# Altium PCB PCB_REV1.PcbDoc (part 1 of 2)
Units mm, origin at the board's own origin, x right, y up, seen from the top; angles counter-clockwise.
Board outline 243.25 x 252.25 mm, 2 copper layers (Top Layer, Bottom Layer); 216 components, 186 nets, 603 pads, 64 vias.
Unrouted connection lines stored in the file: 121.
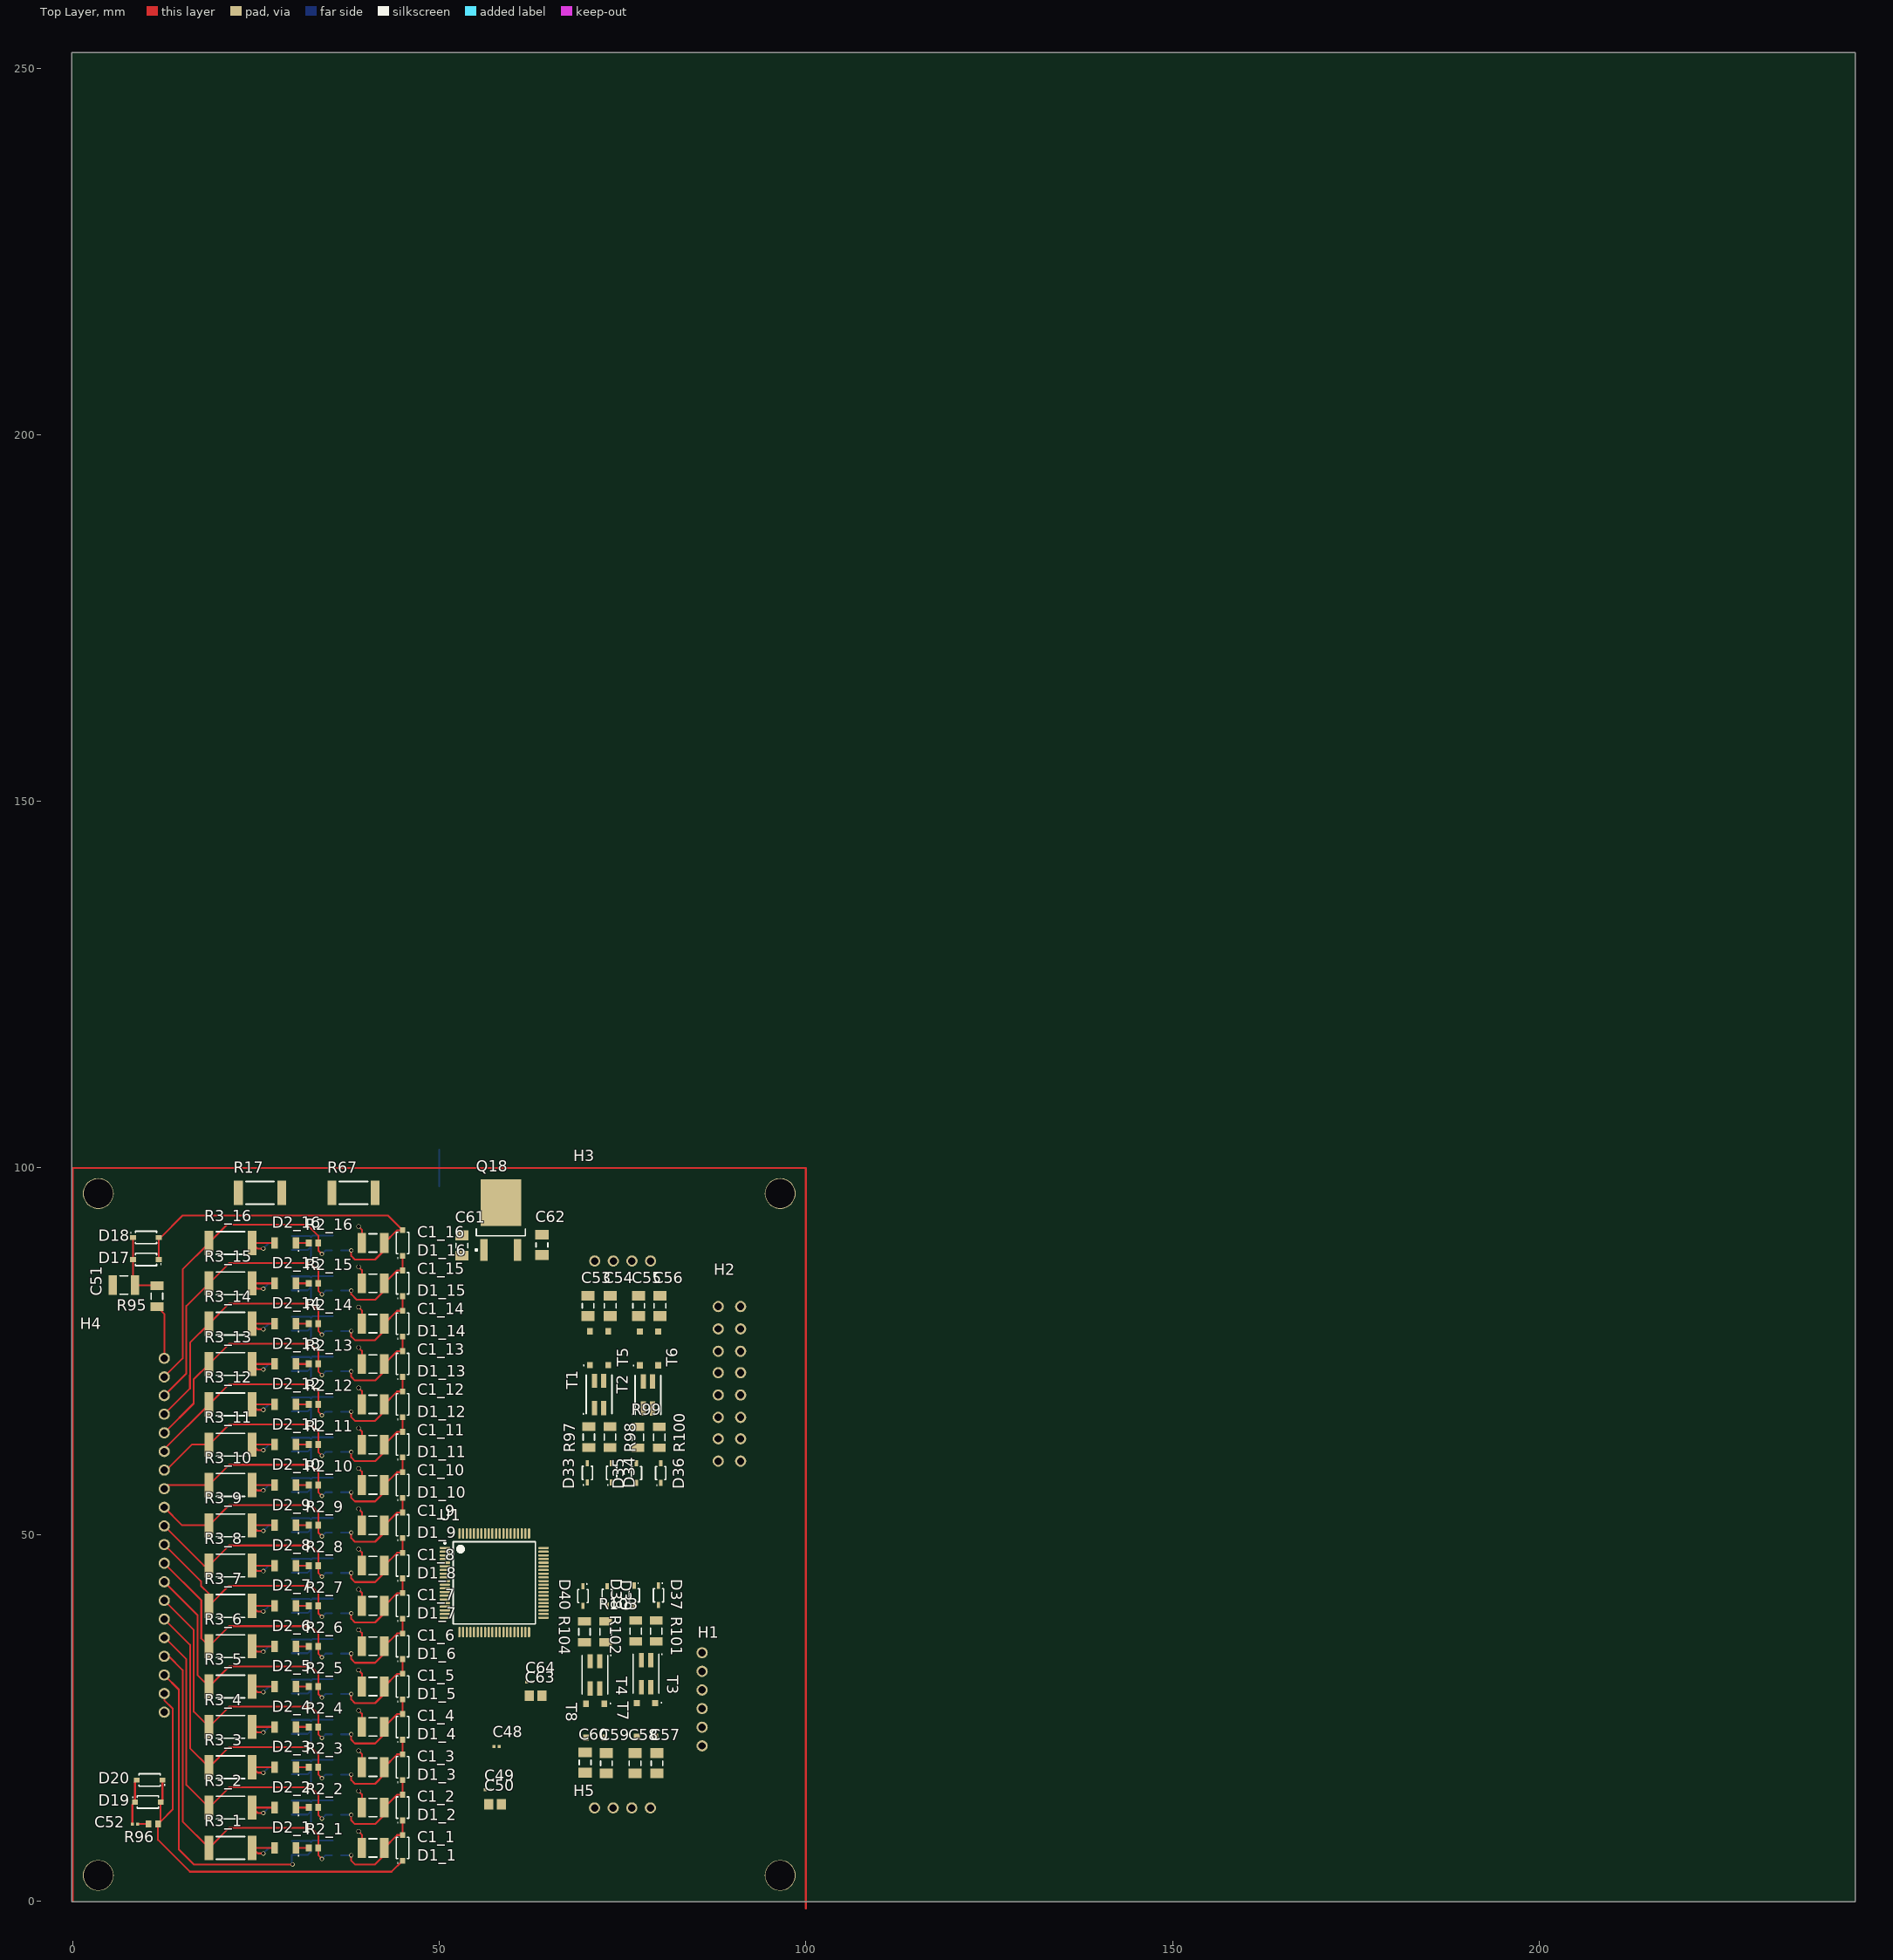
[diagram p0: Top Layer view]
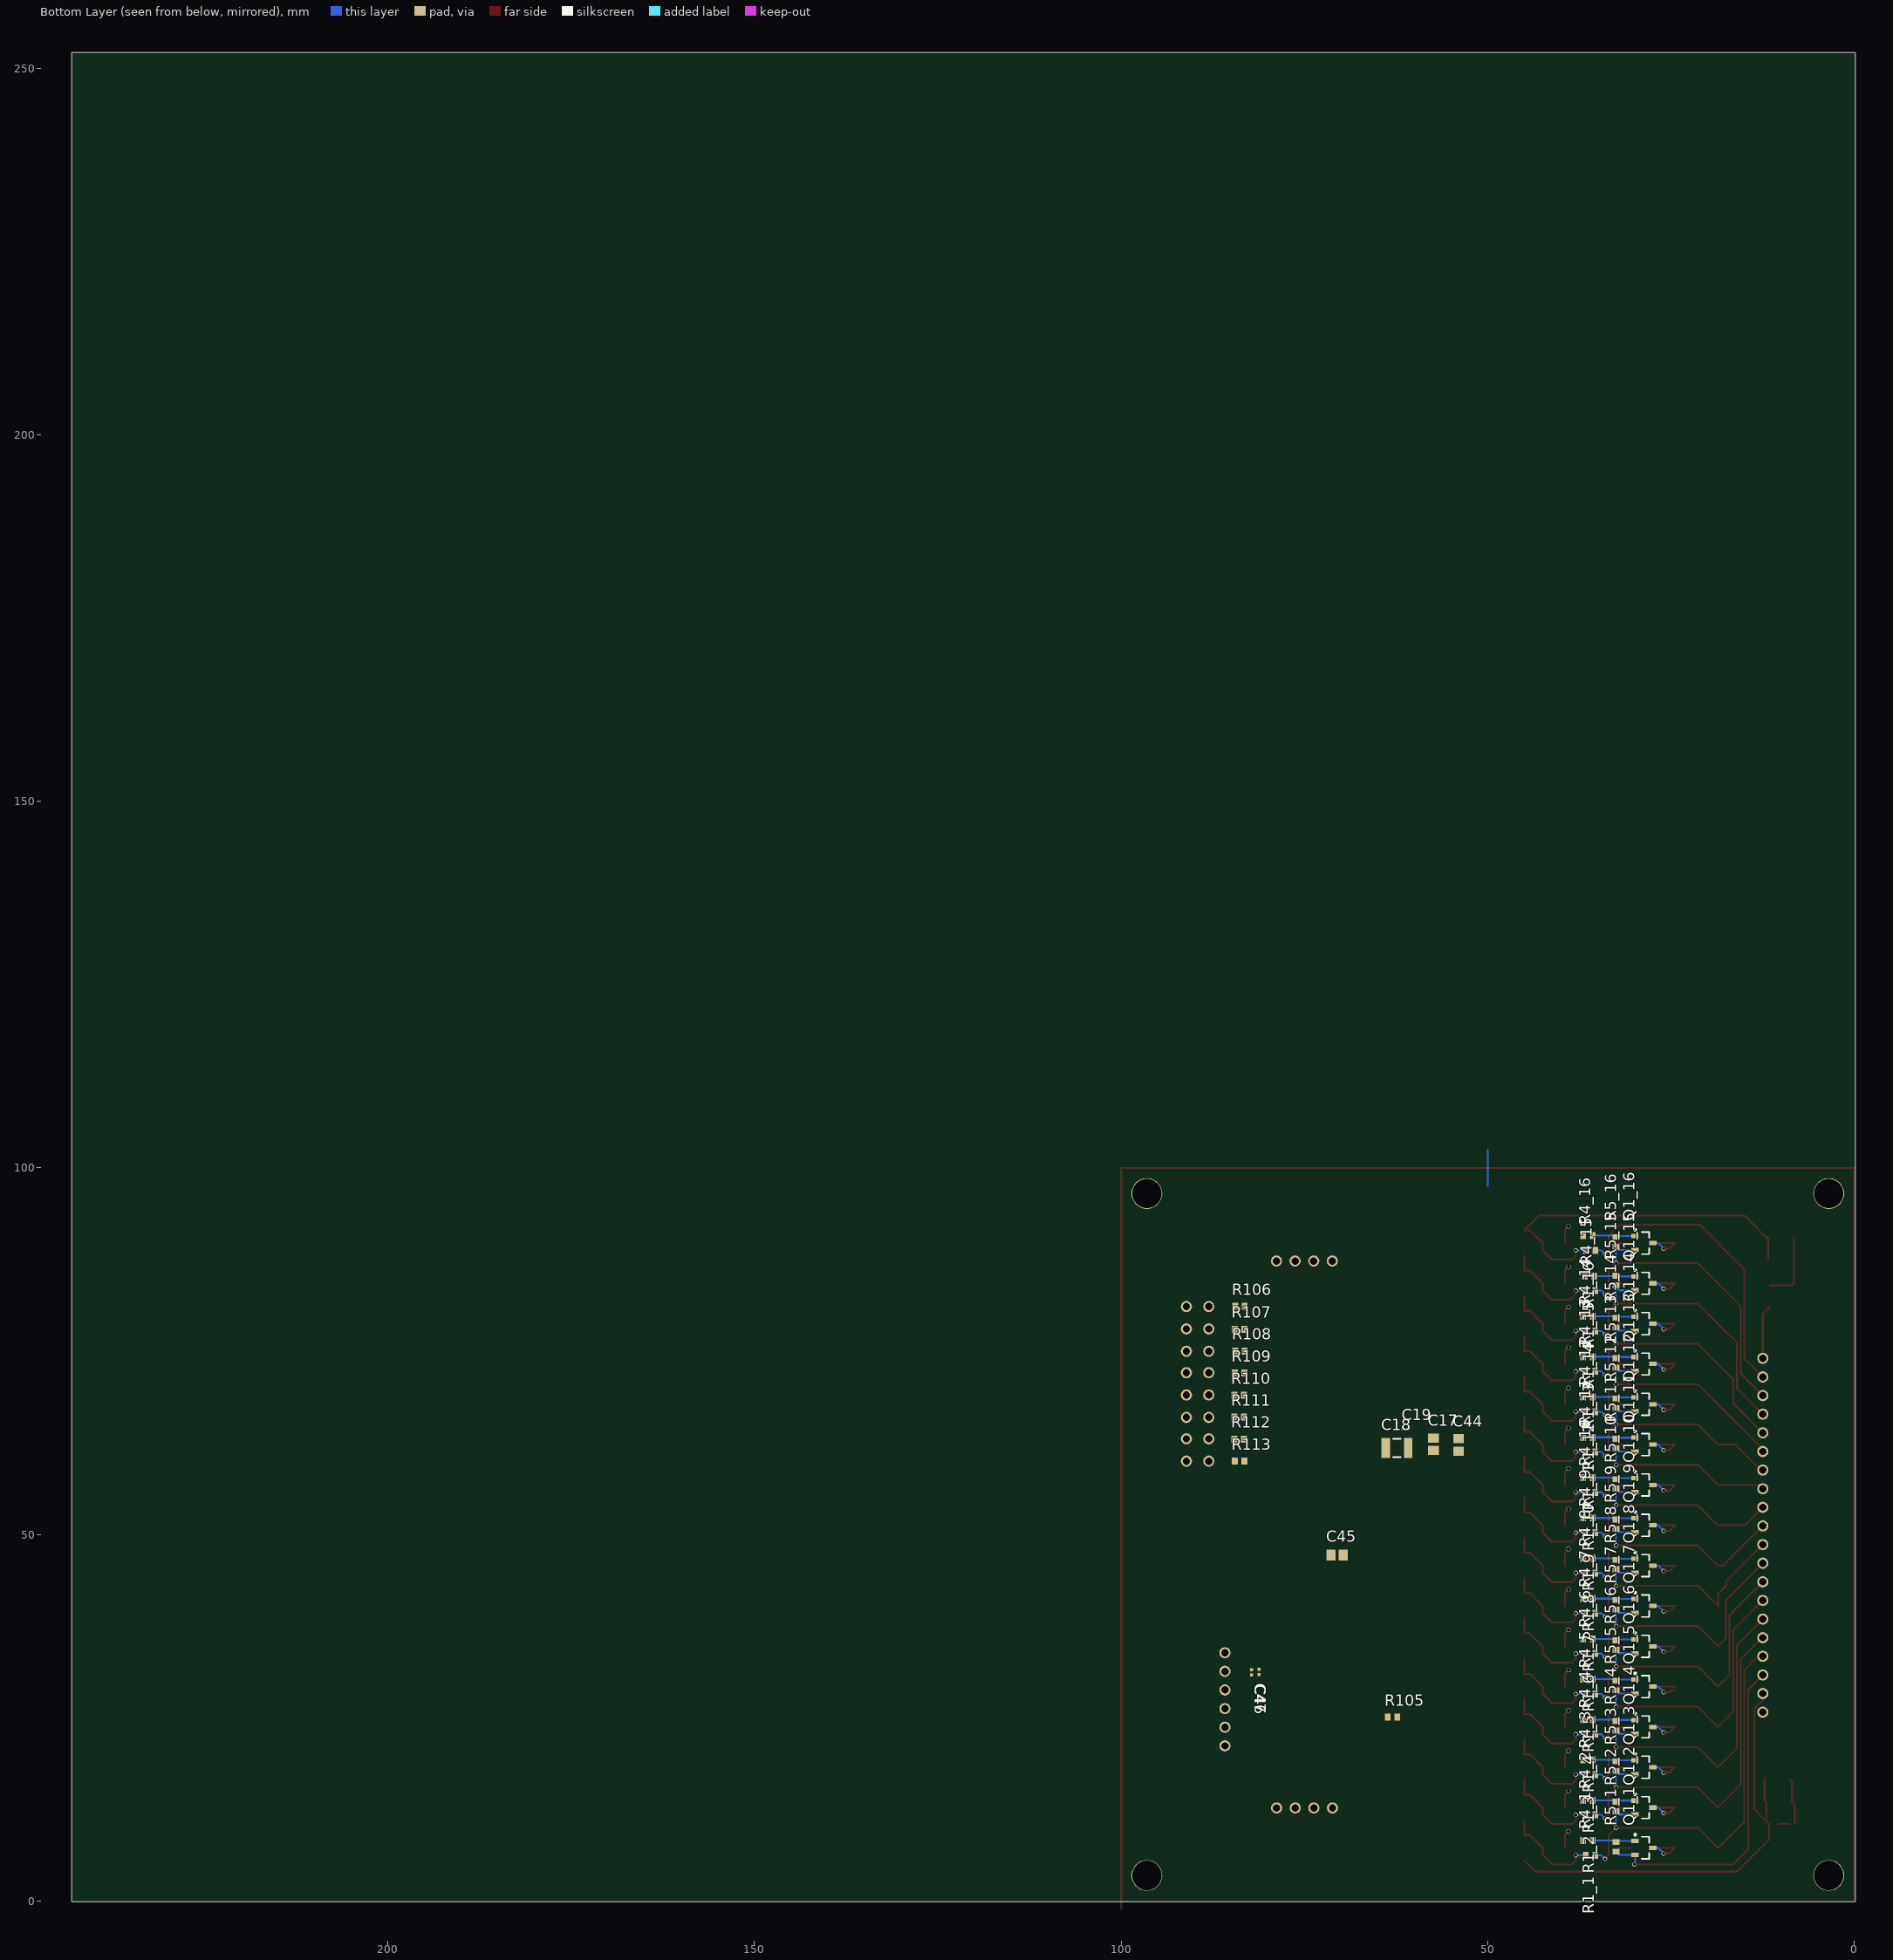
[diagram p1: Bottom Layer view, seen from below]

## Layer stack, top to bottom
Top Solder: solder mask 0.0102, Solder Resist, Dk 3.5
Top Layer: signal copper 0.0356
Dielectric 1: dielectric 0.32, FR-4, Dk 4.8
Bottom Layer: signal copper 0.0356
Bottom Solder: solder mask 0.0102, Solder Resist, Dk 3.5

## Board outline
0,-0.127 cw(c0,0) -0.127,0 -0.127,252 cw(c0,252) 0,252.127 243,252.127 cw(c243,252) 243.127,252 cw(c243,252) 243.127,251.999 243.127,0 cw(c243,0) 243,-0.127

## Design rules (kind name [scope] priority, off if disabled: settings)
Clearance [All] p1: gap=0.254 ignorepadtopadclearanceinfootprint=FALSE except(0: Arc-Hole Track-Hole SMDPad-Hole THPad-Hole Via-Hole Fill-Hole Poly-Hole Region-Hole Text-Hole)
PolygonConnect [All] p1: connectstyle=Relief reliefconductorwidth=0.254 reliefentries=4 polygonreliefangle="90 Angle" airgapwidth=0.254
RoutingVias [All] p1: holewidth=0.711 width=1.27 viastyle="Through Hole" minholewidth=0.711 minwidth=1.27 maxholewidth=0.711 maxwidth=1.27
SolderMaskExpansion [All] p1: expansion=0.102
Width [All] p1: maxlimit=0.254 minlimit=0.254 preferedwidth=0.254
30 further rules are at their usual default settings.

## Classes and differential pairs
component class 2: C51 C52 D17 D18 D19 D20 H4 R95 R96
component class 1: C1_1 C65 D1_1 D2_1 D41 D42 Q1_1 Q19 R1_1 R2_1 R3_1 R4_1 R5_1 R114 R115 R116 R117 R118
component class 2: C1_2 D1_2 D2_2 Q1_2 R1_2 R2_2 R3_2 R4_2 R5_2
component class 3: C1_3 D1_3 D2_3 Q1_3 R1_3 R2_3 R3_3 R4_3 R5_3
component class 4: C1_4 D1_4 D2_4 Q1_4 R1_4 R2_4 R3_4 R4_4 R5_4
component class 5: C1_5 D1_5 D2_5 Q1_5 R1_5 R2_5 R3_5 R4_5 R5_5
component class 6: C1_6 D1_6 D2_6 Q1_6 R1_6 R2_6 R3_6 R4_6 R5_6
component class 7: C1_7 D1_7 D2_7 Q1_7 R1_7 R2_7 R3_7 R4_7 R5_7
component class 8: C1_8 D1_8 D2_8 Q1_8 R1_8 R2_8 R3_8 R4_8 R5_8
component class 9: C1_9 D1_9 D2_9 Q1_9 R1_9 R2_9 R3_9 R4_9 R5_9
component class 10: C1_10 D1_10 D2_10 Q1_10 R1_10 R2_10 R3_10 R4_10 R5_10
component class 11: C1_11 D1_11 D2_11 Q1_11 R1_11 R2_11 R3_11 R4_11 R5_11
component class 12: C1_12 D1_12 D2_12 Q1_12 R1_12 R2_12 R3_12 R4_12 R5_12
component class 13: C1_13 D1_13 D2_13 Q1_13 R1_13 R2_13 R3_13 R4_13 R5_13
component class 14: C1_14 D1_14 D2_14 Q1_14 R1_14 R2_14 R3_14 R4_14 R5_14
component class 15: C1_15 D1_15 D2_15 Q1_15 R1_15 R2_15 R3_15 R4_15 R5_15
component class 16: C1_16 D1_16 D2_16 Q1_16 R1_16 R2_16 R3_16 R4_16 R5_16
channel class VSENSE_EQ: 1 2 3 4 5 6 7 8 9 10 11 12 13 14 15 16

## Components (designator, comment, footprint, x,y, rotation, side; value= is the part's Value field where it differs from the comment)
C1_1 "Cap" "1210 cap" 40.975,7.25 r0 top value=1uF (schematic designator C1)
C1_2 "Cap" "1210 cap" 40.975,12.75 r0 top value=1uF (schematic designator C1)
C1_3 "Cap" "1210 cap" 40.975,18.25 r0 top value=1uF (schematic designator C1)
C1_4 "Cap" "1210 cap" 40.975,23.75 r0 top value=1uF (schematic designator C1)
C1_5 "Cap" "1210 cap" 40.975,29.25 r0 top value=1uF (schematic designator C1)
C1_6 "Cap" "1210 cap" 40.975,34.75 r0 top value=1uF (schematic designator C1)
C1_7 "Cap" "1210 cap" 40.975,40.25 r0 top value=1uF (schematic designator C1)
C1_8 "Cap" "1210 cap" 40.975,45.75 r0 top value=1uF (schematic designator C1)
C1_9 "Cap" "1210 cap" 40.975,51.25 r0 top value=1uF (schematic designator C1)
C1_10 "Cap" "1210 cap" 40.975,56.75 r0 top value=1uF (schematic designator C1)
C1_11 "Cap" "1210 cap" 40.975,62.25 r0 top value=1uF (schematic designator C1)
C1_12 "Cap" "1210 cap" 40.975,67.75 r0 top value=1uF (schematic designator C1)
C1_13 "Cap" "1210 cap" 40.975,73.25 r0 top value=1uF (schematic designator C1)
C1_14 "Cap" "1210 cap" 40.975,78.75 r0 top value=1uF (schematic designator C1)
C1_15 "Cap" "1210 cap" 40.975,84.25 r0 top value=1uF (schematic designator C1)
C1_16 "Cap" "1210 cap" 40.975,89.75 r0 top value=1uF (schematic designator C1)
C17 "Cap Semi" "0805 CAP" 57.4,62.3 r270 bottom value=390pF
C18 "Cap Semi" "1210 cap" 62.4,61.8 r180 bottom value=1.8uF
C19 "Cap Semi" "0603 CAP" 61.2,64.4 r180 bottom value=0.1uF
C44 "Cap Semi" "0805 CAP" 54,62.2 r270 bottom value=390pF
C45 "Cap Semi" "0805 CAP" 70.55,47.2 r0 bottom value="4.7 u"
C46 "Cap Semi" "0603 CAP" 82.2,31.2 r90 bottom value=0.1uF
C47 "Cap Semi" "0603 CAP" 81.2,31.25 r90 bottom value=1uF
C48 "Cap Semi" "0603 CAP" 57.8,21.1 r0 top value=0.022uF
C49 "Cap Semi" "0603 CAP" 56.65,15.2 r0 top value=0.1uF
C50 "Cap Semi" "0805 CAP" 57.6,13.2 r0 top value=4.7uF
C51 "Cap Semi" "1210 cap" 7,84 r0 top value=0.1uF
C52 "Cap Semi" "0603 CAP" 8.5,10.5 r0 top value=100pF
C53 "Cap Semi" "1206 CAP" 70.3,81.175 r90 top value=1000pF
C54 "Cap Semi" "1206 CAP" 73.3,81.175 r90 top value=1000pF
C55 "Cap Semi" "1206 CAP" 77.2,81.175 r90 top value=1000pF
C56 "Cap Semi" "1206 CAP" 80.1,81.175 r90 top value=1000pF
C57 "Cap Semi" "1206 CAP" 79.7,18.8 r270 top value=1000pF
C58 "Cap Semi" "1206 CAP" 76.7,18.8 r270 top value=1000pF
C59 "Cap Semi" "1206 CAP" 72.8,18.8 r270 top value=1000pF
C60 "Cap Semi" "1206 CAP" 69.9,18.9 r270 top value=1000pF
C61 "Cap Semi" "1206 CAP" 53.1,89.4 r270 top value=1uF
C62 "Cap Semi" "1206 CAP" 64,89.5 r270 top value=4.7uF
C63 "Cap Semi" "0805 CAP" 63.15,28 r180 top value=4.7uF
C64 "Cap Semi" "0603 CAP" 62.3,29.9 r180 top value=0.1uF
D1_1 "D Zener" "ZENER DIODE" 45,7.25 r90 top (schematic designator D1)
D1_2 "D Zener" "ZENER DIODE" 45,12.75 r90 top (schematic designator D1)
D1_3 "D Zener" "ZENER DIODE" 45,18.25 r90 top (schematic designator D1)
D1_4 "D Zener" "ZENER DIODE" 45,23.75 r90 top (schematic designator D1)
D1_5 "D Zener" "ZENER DIODE" 45,29.25 r90 top (schematic designator D1)
D1_6 "D Zener" "ZENER DIODE" 45,34.75 r90 top (schematic designator D1)
D1_7 "D Zener" "ZENER DIODE" 45,40.25 r90 top (schematic designator D1)
D1_8 "D Zener" "ZENER DIODE" 45,45.75 r90 top (schematic designator D1)
D1_9 "D Zener" "ZENER DIODE" 45,51.25 r90 top (schematic designator D1)
D1_10 "D Zener" "ZENER DIODE" 45,56.75 r90 top (schematic designator D1)
D1_11 "D Zener" "ZENER DIODE" 45,62.25 r90 top (schematic designator D1)
D1_12 "D Zener" "ZENER DIODE" 45,67.75 r90 top (schematic designator D1)
D1_13 "D Zener" "ZENER DIODE" 45,73.25 r90 top (schematic designator D1)
D1_14 "D Zener" "ZENER DIODE" 45,78.75 r90 top (schematic designator D1)
D1_15 "D Zener" "ZENER DIODE" 45,84.25 r90 top (schematic designator D1)
D1_16 "D Zener" "ZENER DIODE" 45,89.75 r90 top (schematic designator D1)
D2_1 "LED0" LED 29,7.25 r180 top (schematic designator D2)
D2_2 "LED0" LED 29,12.75 r180 top (schematic designator D2)
D2_3 "LED0" LED 29,18.25 r180 top (schematic designator D2)
D2_4 "LED0" LED 29,23.75 r180 top (schematic designator D2)
D2_5 "LED0" LED 29,29.25 r180 top (schematic designator D2)
D2_6 "LED0" LED 29,34.75 r180 top (schematic designator D2)
D2_7 "LED0" LED 29,40.25 r180 top (schematic designator D2)
D2_8 "LED0" LED 29,45.75 r180 top (schematic designator D2)
D2_9 "LED0" LED 29,51.25 r180 top (schematic designator D2)
D2_10 "LED0" LED 29,56.75 r180 top (schematic designator D2)
D2_11 "LED0" LED 29,62.25 r180 top (schematic designator D2)
D2_12 "LED0" LED 29,67.75 r180 top (schematic designator D2)
D2_13 "LED0" LED 29,73.25 r180 top (schematic designator D2)
D2_14 "LED0" LED 29,78.75 r180 top (schematic designator D2)
D2_15 "LED0" LED 29,84.25 r180 top (schematic designator D2)
D2_16 "LED0" LED 29,89.75 r180 top (schematic designator D2)
D17 "" "DIODE BtoB" 10,87.5 r180 top
D18 "" "DIODE BtoB" 10,90.5 r0 top
D19 "" "DIODE BtoB" 10.25,13.5 r0 top
D20 "" "DIODE BtoB" 10.5,16.5 r180 top
D33 "TVS" "TVS DIODE" 70.2,58.4 r90 top
D34 "TVS" "TVS DIODE" 73.5,58.4 r90 top
D35 "TVS" "TVS DIODE" 76.9,58.375 r90 top
D36 "TVS" "TVS DIODE" 80.2,58.375 r90 top
D37 "TVS" "TVS DIODE" 79.9,41.7 r270 top
D38 "TVS" "TVS DIODE" 76.6,41.7 r270 top
D39 "TVS" "TVS DIODE" 72.9,41.625 r270 top
D40 "TVS" "TVS DIODE" 69.6,41.6 r270 top
H1 "HDR 6" "SERIAL HDR" 100.2,19.9 r90 top
H2 "HDR 16" "THERMO HDR" 99.99,56.444 r90 top
H3 "HDR 4" "COMM HDR" 81.995,100.127 r180 top
H4 "HDR 20" "CELL HDR" -0.835,77.195 r270 top
H5 "HDR 4" "COMM HDR" 68.005,-0.127 r0 top
Q1_1 "2V7002K" N-MOSFET 28.7,7.25 r180 bottom (schematic designator Q1)
Q1_2 "2V7002K" N-MOSFET 28.7,12.75 r180 bottom (schematic designator Q1)
Q1_3 "2V7002K" N-MOSFET 28.7,18.25 r180 bottom (schematic designator Q1)
Q1_4 "2V7002K" N-MOSFET 28.7,23.75 r180 bottom (schematic designator Q1)
Q1_5 "2V7002K" N-MOSFET 28.7,29.25 r180 bottom (schematic designator Q1)
Q1_6 "2V7002K" N-MOSFET 28.7,34.75 r180 bottom (schematic designator Q1)
Q1_7 "2V7002K" N-MOSFET 28.7,40.25 r180 bottom (schematic designator Q1)
Q1_8 "2V7002K" N-MOSFET 28.7,45.75 r180 bottom (schematic designator Q1)
Q1_9 "2V7002K" N-MOSFET 28.7,51.25 r180 bottom (schematic designator Q1)
Q1_10 "2V7002K" N-MOSFET 28.7,56.75 r180 bottom (schematic designator Q1)
Q1_11 "2V7002K" N-MOSFET 28.7,62.25 r180 bottom (schematic designator Q1)
Q1_12 "2V7002K" N-MOSFET 28.7,67.75 r180 bottom (schematic designator Q1)
Q1_13 "2V7002K" N-MOSFET 28.7,73.25 r180 bottom (schematic designator Q1)
Q1_14 "2V7002K" N-MOSFET 28.7,78.75 r180 bottom (schematic designator Q1)
Q1_15 "2V7002K" N-MOSFET 28.7,84.25 r180 bottom (schematic designator Q1)
Q1_16 "2V7002K" N-MOSFET 28.7,89.75 r180 bottom (schematic designator Q1)
Q18 "QNPN" "NPN TRANSISTOR" 58.4,92.9 r90 top
R1_1 "Res1" "0603 RES" 36,6.25 r180 bottom value=1K (schematic designator R1)
R1_2 "Res1" "0603 RES" 36,11.75 r180 bottom value=1K (schematic designator R1)
R1_3 "Res1" "0603 RES" 36,17.25 r180 bottom value=1K (schematic designator R1)
R1_4 "Res1" "0603 RES" 36,22.75 r180 bottom value=1K (schematic designator R1)
R1_5 "Res1" "0603 RES" 36,28.25 r180 bottom value=1K (schematic designator R1)
R1_6 "Res1" "0603 RES" 36,33.75 r180 bottom value=1K (schematic designator R1)
R1_7 "Res1" "0603 RES" 36,39.25 r180 bottom value=1K (schematic designator R1)
R1_8 "Res1" "0603 RES" 36,44.75 r180 bottom value=1K (schematic designator R1)
R1_9 "Res1" "0603 RES" 36,50.25 r180 bottom value=1K (schematic designator R1)
R1_10 "Res1" "0603 RES" 36,55.75 r180 bottom value=1K (schematic designator R1)
R1_11 "Res1" "0603 RES" 36,61.25 r180 bottom value=1K (schematic designator R1)
R1_12 "Res1" "0603 RES" 36,66.75 r180 bottom value=1K (schematic designator R1)
R1_13 "Res1" "0603 RES" 36,72.25 r180 bottom value=1K (schematic designator R1)
R1_14 "Res1" "0603 RES" 36,77.75 r180 bottom value=1K (schematic designator R1)
R1_15 "Res1" "0603 RES" 36,83.25 r180 bottom value=1K (schematic designator R1)
R1_16 "Res1" "0603 RES" 36,88.75 r180 bottom value=1K (schematic designator R1)
R2_1 "Res1" "0603 RES" 32.85,7.25 r0 top value=1K (schematic designator R2)
R2_2 "Res1" "0603 RES" 32.85,12.75 r0 top value=1K (schematic designator R2)
R2_3 "Res1" "0603 RES" 32.85,18.25 r0 top value=1K (schematic designator R2)
R2_4 "Res1" "0603 RES" 32.85,23.75 r0 top value=1K (schematic designator R2)
R2_5 "Res1" "0603 RES" 32.85,29.25 r0 top value=1K (schematic designator R2)
R2_6 "Res1" "0603 RES" 32.85,34.75 r0 top value=1K (schematic designator R2)
R2_7 "Res1" "0603 RES" 32.85,40.25 r0 top value=1K (schematic designator R2)
R2_8 "Res1" "0603 RES" 32.85,45.75 r0 top value=1K (schematic designator R2)
R2_9 "Res1" "0603 RES" 32.85,51.25 r0 top value=1K (schematic designator R2)
R2_10 "Res1" "0603 RES" 32.85,56.75 r0 top value=1K (schematic designator R2)
R2_11 "Res1" "0603 RES" 32.85,62.25 r0 top value=1K (schematic designator R2)
R2_12 "Res1" "0603 RES" 32.85,67.75 r0 top value=1K (schematic designator R2)
R2_13 "Res1" "0603 RES" 32.85,73.25 r0 top value=1K (schematic designator R2)
R2_14 "Res1" "0603 RES" 32.85,78.75 r0 top value=1K (schematic designator R2)
R2_15 "Res1" "0603 RES" 32.85,84.25 r0 top value=1K (schematic designator R2)
R2_16 "Res1" "0603 RES" 32.85,89.75 r0 top value=1K (schematic designator R2)
R3_1 "Res1" "2512 RES" 21.55,7.25 r0 top value=75 (schematic designator R3)
R3_2 "Res1" "2512 RES" 21.55,12.75 r0 top value=75 (schematic designator R3)
R3_3 "Res1" "2512 RES" 21.55,18.25 r0 top value=75 (schematic designator R3)
R3_4 "Res1" "2512 RES" 21.55,23.75 r0 top value=75 (schematic designator R3)
R3_5 "Res1" "2512 RES" 21.55,29.25 r0 top value=75 (schematic designator R3)
R3_6 "Res1" "2512 RES" 21.55,34.75 r0 top value=75 (schematic designator R3)
R3_7 "Res1" "2512 RES" 21.55,40.25 r0 top value=75 (schematic designator R3)
R3_8 "Res1" "2512 RES" 21.55,45.75 r0 top value=75 (schematic designator R3)
R3_9 "Res1" "2512 RES" 21.55,51.25 r0 top value=75 (schematic designator R3)
R3_10 "Res1" "2512 RES" 21.55,56.75 r0 top value=75 (schematic designator R3)
R3_11 "Res1" "2512 RES" 21.55,62.25 r0 top value=75 (schematic designator R3)
R3_12 "Res1" "2512 RES" 21.55,67.75 r0 top value=75 (schematic designator R3)
R3_13 "Res1" "2512 RES" 21.55,73.25 r0 top value=75 (schematic designator R3)
R3_14 "Res1" "2512 RES" 21.55,78.75 r0 top value=75 (schematic designator R3)
R3_15 "Res1" "2512 RES" 21.55,84.25 r0 top value=75 (schematic designator R3)
R3_16 "Res1" "2512 RES" 21.55,89.75 r0 top value=75 (schematic designator R3)
R4_1 "Res1" "0603 RES" 36.35,8.25 r180 bottom value=2K (schematic designator R4)
R4_2 "Res1" "0603 RES" 36.35,13.75 r180 bottom value=2K (schematic designator R4)
R4_3 "Res1" "0603 RES" 36.35,19.25 r180 bottom value=2K (schematic designator R4)
R4_4 "Res1" "0603 RES" 36.35,24.75 r180 bottom value=2K (schematic designator R4)
R4_5 "Res1" "0603 RES" 36.35,30.25 r180 bottom value=2K (schematic designator R4)
R4_6 "Res1" "0603 RES" 36.35,35.75 r180 bottom value=2K (schematic designator R4)
R4_7 "Res1" "0603 RES" 36.35,41.25 r180 bottom value=2K (schematic designator R4)
R4_8 "Res1" "0603 RES" 36.35,46.75 r180 bottom value=2K (schematic designator R4)
R4_9 "Res1" "0603 RES" 36.35,52.25 r180 bottom value=2K (schematic designator R4)
R4_10 "Res1" "0603 RES" 36.35,57.75 r180 bottom value=2K (schematic designator R4)
R4_11 "Res1" "0603 RES" 36.35,63.25 r180 bottom value=2K (schematic designator R4)
R4_12 "Res1" "0603 RES" 36.35,68.75 r180 bottom value=2K (schematic designator R4)
R4_13 "Res1" "0603 RES" 36.35,74.25 r180 bottom value=2K (schematic designator R4)
R4_14 "Res1" "0603 RES" 36.35,79.75 r180 bottom value=2K (schematic designator R4)
R4_15 "Res1" "0603 RES" 36.15,85.25 r180 bottom value=2K (schematic designator R4)
R4_16 "Res1" "0603 RES" 36.35,90.75 r180 bottom value=2K (schematic designator R4)
R5_1 "Res1" "0603 RES" 32.5,7.4 r90 bottom value=100K (schematic designator R5)
R5_2 "Res1" "0603 RES" 32.5,12.9 r90 bottom value=100K (schematic designator R5)
R5_3 "Res1" "0603 RES" 32.5,18.4 r90 bottom value=100K (schematic designator R5)
R5_4 "Res1" "0603 RES" 32.5,23.9 r90 bottom value=100K (schematic designator R5)
R5_5 "Res1" "0603 RES" 32.5,29.4 r90 bottom value=100K (schematic designator R5)
R5_6 "Res1" "0603 RES" 32.5,34.9 r90 bottom value=100K (schematic designator R5)
R5_7 "Res1" "0603 RES" 32.5,40.4 r90 bottom value=100K (schematic designator R5)
R5_8 "Res1" "0603 RES" 32.5,45.9 r90 bottom value=100K (schematic designator R5)
R5_9 "Res1" "0603 RES" 32.5,51.4 r90 bottom value=100K (schematic designator R5)
R5_10 "Res1" "0603 RES" 32.5,56.9 r90 bottom value=100K (schematic designator R5)
R5_11 "Res1" "0603 RES" 32.5,62.4 r90 bottom value=100K (schematic designator R5)
R5_12 "Res1" "0603 RES" 32.5,67.9 r90 bottom value=100K (schematic designator R5)
R5_13 "Res1" "0603 RES" 32.5,73.4 r90 bottom value=100K (schematic designator R5)
R5_14 "Res1" "0603 RES" 32.5,78.9 r90 bottom value=100K (schematic designator R5)
R5_15 "Res1" "0603 RES" 32.5,84.65 r90 bottom value=100K (schematic designator R5)
R5_16 "Res1" "0603 RES" 32.5,89.9 r90 bottom value=100K (schematic designator R5)
R17 "RES3" "2512 RES" 25.55,96.6 r0 top value=200
R67 "RES3" "2512 RES" 38.3,96.6 r0 top value=200
R95 "Res3" "1206 RES" 11.5,82.5 r270 top value=100
R96 "Res3" "0603 RES" 11,10.5 r180 top value=1K
R97 "Res3" "1206 RES" 70.4,63.275 r90 top value=10
R98 "Res3" "1206 RES" 73.3,63.275 r90 top value=10
R99 "Res3" "1206 RES" 77.1,63.25 r90 top value=10
R100 "Res3" "1206 RES" 80,63.25 r90 top value=10
R101 "Res3" "1206 RES" 79.6,36.825 r270 top value=10
R102 "Res3" "1206 RES" 76.8,36.825 r270 top value=10
R103 "Res3" "1206 RES" 72.7,36.725 r270 top value=10
R104 "Res3" "1206 RES" 69.8,36.725 r270 top value=10
R105 "Res3" "0603 RES" 63,25.1 r180 bottom value=1
R106 "Res3" "0603 RES" 83.8,81.1 r0 bottom value=10K
R107 "Res3" "0603 RES" 83.85,78 r0 bottom value=10K
R108 "Res3" "0603 RES" 83.8,75 r0 bottom value=10K
R109 "Res3" "0603 RES" 83.85,72 r0 bottom value=10K
R110 "Res3" "0603 RES" 83.9,69 r0 bottom value=10K
R111 "Res3" "0603 RES" 83.9,66 r0 bottom value=10K
R112 "Res3" "0603 RES" 83.9,63 r0 bottom value=10K
R113 "Res3" "0603 RES" 83.85,60 r0 bottom value=10K
T1 "CHOKE NODE 470u" "CHOKE NODE 470u" 71.8,69.1 r90 top
T2 "CHOKE NODE 470u" "CHOKE NODE 470u" 78.465,69.025 r90 top
T3 "CHOKE NODE 470u" "CHOKE NODE 470u" 78.2,31 r270 top
T4 "CHOKE NODE 470u" "CHOKE NODE 470u" 71.235,30.85 r270 top
T5 "CHOKE NODE 100u" "CHOKE NODE 100u" 71.8,75.4 r90 top
T6 "CHOKE NODE 100u" "CHOKE NODE 100u" 78.6,75.375 r90 top
T7 "CHOKE NODE 100u" "CHOKE NODE 100u" 78.2,24.7 r270 top
T8 "CHOKE NODE 100u" "CHOKE NODE 100u" 71.25,24.6 r270 top
U1 "BQ76PL455A-Q1" BQ76PL455A-Q1 57.5,43.4 r0 top

## Footprints (in the part's own frame and the unit in brackets; to place one, negate y for a bottom-side part, rotate by r counter-clockwise, add the part's x,y. Pads: shape width x height; smd on the part's side, far side on the other; paste and mask are expansions set on the pad)
"0603 CAP" [mm] "C1608X7R1C105K"
  rect 0.42x0.42 smd: 1(-0.35,0) 2(0.35,0)
  body extent -0.31,-0.17 0.32,0.16, height 0.33
"0603 RES" [mm] "Chip Resistor, 2-Leads, Body 1.57x0.85mm, IPC Medium Density"
  rect 0.8x0.95 smd: 1(-0.65,0) 2(0.65,0)
  body extent -0.83,-0.48 0.82,0.48, height 0.5
"0805 CAP" [mm] "Chip Capacitor, 2-Leads, Body 2.00x1.25mm, IPC Medium Density"
  rect 1.25x1.45 smd: 1(-0.85,0) 2(0.85,0)
  body extent -1.07,-0.7 1.08,0.7, height 1.4
"1206 CAP" [mm] "Chip Capacitor, 2-Leads, Body 3.20x1.60mm, IPC Medium Density"
  rect 1.35x1.8 smd: 1(-1.375,0) 2(1.375,0)
  silkscreen extent -0.3,-0.8 0.3,0.8, body extent -1.7,-0.9 1.7,0.9, height 1.8
"1206 RES" [mm] "Chip Resistor, 2-Leads, Body 3.15x1.60mm, IPC Medium Density"
  rect 1.15x1.75 smd: 1(-1.425,0) 2(1.425,0)
  silkscreen extent -0.45,-0.77 0.45,0.77, body extent -1.65,-0.87 1.65,0.87, height 0.6
"1210 cap" [mm] "Chip Capacitor, 2-Leads, Body 3.20x2.50mm, IPC Medium Density"
  rect 1.15x2.7 smd: 1(-1.525,0) 2(1.525,0)
  silkscreen extent -0.55,-1.25 0.55,1.25, body extent -1.75,-1.35 1.75,1.35, height 1.8
"2512 RES" [mm] "Chip Resistor, 2-Leads, Body 6.30x3.15mm, IPC Medium Density"
  rect 1.2x3.3 smd: 1(-2.95,0) 2(2.95,0)
  silkscreen extent -1.95,-1.55 1.95,1.55, body extent -3.16,-1.65 3.16,1.65, height 0.7
BQ76PL455A-Q1 [mm] "MAIN CHIP"
  oval 1.45x0.3 smd: 1(-6.725,4.75) 2(-6.725,4.25) 3(-6.725,3.75) 4(-6.725,3.25) 5(-6.725,2.75) 6(-6.725,2.25) 7(-6.725,1.75) 8(-6.725,1.25) 9(-6.725,0.75) 10(-6.725,0.25) 11(-6.725,-0.25) 12(-6.725,-0.75) 13(-6.725,-1.25) 14(-6.725,-1.75) 15(-6.725,-2.25) 16(-6.725,-2.75) 17(-6.725,-3.25) 18(-6.725,-3.75) 19(-6.725,-4.25) 20(-6.725,-4.75) 41(6.725,-4.75) 42(6.725,-4.25) 43(6.725,-3.75) 44(6.725,-3.25) 45(6.725,-2.75) 46(6.725,-2.25) 47(6.725,-1.75) 48(6.725,-1.25) 49(6.725,-0.75) 50(6.725,-0.25) 51(6.725,0.25) 52(6.725,0.75) 53(6.725,1.25) 54(6.725,1.75) 55(6.725,2.25) 56(6.725,2.75) 57(6.725,3.25) 58(6.725,3.75) 59(6.725,4.25) 60(6.725,4.75)
  oval 0.3x1.45 smd: 21(-4.75,-6.725) 22(-4.25,-6.725) 23(-3.75,-6.725) 24(-3.25,-6.725) 25(-2.75,-6.725) 26(-2.25,-6.725) 27(-1.75,-6.725) 28(-1.25,-6.725) 29(-0.75,-6.725) 30(-0.25,-6.725) 31(0.25,-6.725) 32(0.75,-6.725) 33(1.25,-6.725) 34(1.75,-6.725) 35(2.25,-6.725) 36(2.75,-6.725) 37(3.25,-6.725) 38(3.75,-6.725) 39(4.25,-6.725) 40(4.75,-6.725) 61(4.75,6.725) 62(4.25,6.725) 63(3.75,6.725) 64(3.25,6.725) 65(2.75,6.725) 66(2.25,6.725) 67(1.75,6.725) 68(1.25,6.725) 69(0.75,6.725) 70(0.25,6.725) 71(-0.25,6.725) 72(-0.75,6.725) 73(-1.25,6.725) 74(-1.75,6.725) 75(-2.25,6.725) 76(-2.75,6.725) 77(-3.25,6.725) 78(-3.75,6.725) 79(-4.25,6.725) 80(-4.75,6.725)
  silkscreen extent -6.85,-5.6 5.6,5.6, body extent -6,-6 6,6, height 1.2
"CELL HDR" [mil]
  round 60 hole 39.37: 1(2025,525) 2(1925,525) 3(1825,525) 4(1725,525) 5(1625,525) 6(1525,525) 7(1425,525) 8(1325,525) 9(1225,525) 10(1125,525) 11(1025,525) 12(925,525) 13(825,525) 14(725,525) 15(625,525) 16(525,525) 17(425,525) 18(325,525) 19(225,525) 20(125,525)
  body extent 0,20 2150,555, height 278
"CHOKE NODE 100u" [mm] "445-3959-1-ND"
  rect 0.85x0.8 smd: 1(-2.3,1.25) 2(-2.3,-1.25) 3(2.3,-1.25) 4(2.3,1.25)
  silkscreen extent -2.4,2.05 -2.3,2.15, body extent -2.35,-1.7 2.35,1.7, height 3
"CHOKE NODE 470u" [mm] "732-1686-1-ND"
  rect 1.95x0.7 smd: 1(-1.85,0.635) 2(-1.85,-0.635) 3(1.85,-0.635) 4(1.85,0.635)
  silkscreen extent -2.7,-1.75 2.65,2.2, body extent -2.65,-1.75 2.65,1.75, height 3.6
"COMM HDR" [mil]
  round 60 hole 39.37: 1(125,505) 2(225,505) 3(325,505) 4(425,505)
  body extent 0,0 550,535, height 278
"DIODE BtoB" [mm] "1N4148W-7-F"
  rect 0.8x0.7 smd: 1(-1.75,0) 2(1.75,0)
  silkscreen extent -2.1,-0.85 1.45,0.85, body extent -1.85,-0.85 1.85,0.85, height 1.35
LED [mm] "516-1443-1-ND"
  rect 0.9x1.55 smd: 1(-1.45,0) 2(1.45,0)
  silkscreen extent -1.85,1.03 -1.75,1.12, body extent -1.67,-0.83 1.67,0.83, height 1.14
N-MOSFET [mm] "2V7002K"
  rect 1x0.6 smd: 1(-1.2,0.95) 2(-1.2,-0.95) 3(1.2,0)
  silkscreen extent -1.33,-1.5 0.7,1.92, body extent -0.7,-1.52 0.7,1.52, height 1.11
"NPN TRANSISTOR" [mm] "ZXTN4004KTCDICT-ND"
  rect 3x1 smd: 1(-4.1,2.29) 3(-4.1,-2.29)
  rect 6.4x5.55 smd: 4(2.35,0)
  silkscreen extent -4.22,-3.35 -1.25,3.46, body extent -2.15,-3.35 4.05,3.35, height 2.39
"SERIAL HDR" [mil]
  round 60 hole 39.37: 1(50,565) 2(150,565) 3(250,565) 4(350,565) 5(450,565) 6(550,565)
  body extent 0,0 600,580, height 231
"THERMO HDR" [mil]
  round 60 hole 39.37: 1(140,470) 2(260,470) 3(375,470) 4(495,470) 5(615,470) 6(730,470) 7(850,470) 8(970,470) 9(970,350) 10(850,350) 11(730,350) 12(615,350) 13(495,350) 14(375,350) 15(260,350) 16(140,350)
  body extent 0,0 1108,482, height 348
"TVS DIODE" [mm] "1727-4155-1-ND"
  rect 0.85x0.45 smd: 1(-1.325,0) 2(1.325,0)
  silkscreen extent -1.7,-0.7 0.9,0.7, body extent -0.9,-0.67 0.9,0.67, height 1.1
"ZENER DIODE" [mm] "DDZ6V2BDICT-ND"
  rect 0.8x0.7 smd: 1(-1.75,0) 2(1.75,0)
  silkscreen extent -2.1,-0.85 1.45,0.85, body extent -1.42,-0.85 1.43,0.85, height 1.35

## Part data
C1_1 C1_2 C1_3 C1_4 C1_5 C1_6 C1_7 C1_8 C1_9 C1_10 C1_11 C1_12 C1_13 C1_14 C1_15 C1_16: "Capacitor", Capacitance=1uF, Case/Package=1210, Case Code (Metric)=3225, Dielectric=X7R, Manufacturer=Murata, Manufacturer Part Number=GRM32CR72A105KA35L, Max Operating Temperature=125°C, Min Operating Temperature=-55°C, Package Quantity=2000, Supplier Part Number 1=490-8627-1-ND, Tolerance=10%, Voltage=100V, Case Code (Imperial)=1210, Depth=2.5mm, Height=1.6mm, LatestRevisionDate=17-Jul-2002, LatestRevisionNote="Re-released for DXP Platform.", Lead Free="Lead Free", Length=3.2mm, Material=Ceramic, Mount="Surface Mount", Number of Pins=2, PackageDescription="Radial Cap, Thru-Hole; 2 Leads; 0.3 in Pin Spacing", PackageReference=RAD-0.3, Packaging="Tape and Reel", Pricing 1="1=1.28, 10=0.975, 100=0.6972, 500=0.5398, 1000=0.4648 (USD)", Published=8-Jun-2000, Publisher="Altium Limited", Radiation Hardening=No, REACH SVHC="No SVHC", Stock 1=20000, Supplier 1=Digi-Key, Termination=SMD/SMT, Thickness=0.071inch, Voltage Rating=100V, Voltage Rating (DC)=100V, Width=2.5mm
C17 C44: "Capacitor (Semiconductor SIM Model)", Capacitance=390pF, Case/Package=0805, Case Code (Metric)=2012, Dielectric=C0G, Dielectric Material=Ceramic, Manufacturer="Kyocera AVX", Manufacturer Part Number=08055A391JAT2A, Max Operating Temperature=125°C, Min Operating Temperature=-55°C, Package Quantity=1, Supplier Part Number 1=478-1323-1-ND, Temperature Coefficient=30ppm/°C, Tolerance=5%, Voltage=50V, Case Code (Imperial)=0805, Contact Plating=Matte,Tin, Depth=1.25mm, Height=0.94mm, LatestRevisionDate=29-May-2009, LatestRevisionNote="IPC-7351 Footprint Added.", Lead Free="Lead Free", Length=2.01mm, Mount="PCB,Surface Mount", Number of Pins=2, PackageDescription="Chip Capacitor", PackageReference=C1206, Packaging="Tape and Reel", Pricing 1="1=0.22, 10=0.16, 100=0.075, 500=0.0526, 1000=0.0436 (USD)", Published=8-Jun-2000, Publisher="Altium Limited", Radiation Hardening=No, REACH SVHC="No SVHC", Stock 1=18, Supplier 1=Digi-Key, Termination=SMD/SMT, Thickness=0.037inch, Voltage Rating=50V, Voltage Rating (DC)=50V, Width=1.25mm
C18: "Capacitor (Semiconductor SIM Model)", Capacitance=1.8uF, Case/Package=1210, Case Code (Metric)=3225, Dielectric=X7R, Dielectric Material=Ceramic, Manufacturer=KEMET, Manufacturer Part Number=C1210C185K3RACTU, Max Operating Temperature=125°C, Min Operating Temperature=-55°C, Package Quantity=1, Supplier Part Number 1=399-3082-1-ND, Tolerance=10%, Voltage=25V, Case Code (Imperial)=1210, Depth=2.5mm, Dissipation Factor=3.5%, Height=1.55mm, LatestRevisionDate=29-May-2009, LatestRevisionNote="IPC-7351 Footprint Added.", Length=3.2mm, Mount="PCB,Surface Mount", PackageDescription="Chip Capacitor", PackageReference=C1206, Packaging="Tape and Reel", Pricing 1="1=1.15, 10=0.876, 100=0.6267, 500=0.4852, 1000=0.4178 (USD)", Published=8-Jun-2000, Publisher="Altium Limited", REACH SVHC="No SVHC", Stock 1=3925, Supplier 1=Digi-Key, Termination=SMD/SMT, Thickness=0.067inch, Voltage Rating=25V, Voltage Rating (DC)=25V, Width=0.098inch
C19 C46 C49 C64: "Capacitor (Semiconductor SIM Model)", Capacitance=100nF, Case/Package=0603, Case Code (Metric)=1608, Dielectric=X7R, Dielectric Material=Ceramic, Manufacturer=KEMET, Manufacturer Part Number=C0603X104K3RACTU, Max Operating Temperature=125°C, Min Operating Temperature=-55°C, Package Quantity=1, Supplier Part Number 1=399-5345-1-ND, Tolerance=10%, Voltage=25V, Case Code (Imperial)=0603, Contact Plating=Matte,Tin, Depth=0.8mm, Dissipation Factor=3.5%, Features="Soft Termination", Height=0.8mm, LatestRevisionDate=29-May-2009, LatestRevisionNote="IPC-7351 Footprint Added.", Length=1.6mm, Mount="PCB,Surface Mount", Number of Pins=2, PackageDescription="Chip Capacitor", PackageReference=C1206, Packaging="Tape and Reel", Pricing 1="1=0.34, 10=0.237, 100=0.1423, 500=0.1067, 1000=0.0901 (USD)", Published=8-Jun-2000, Publisher="Altium Limited", Radiation Hardening=No, REACH SVHC="No SVHC", Stock 1=0, Supplier 1=Digi-Key, Termination=SMD/SMT, Thickness=0.034inch, Voltage Rating=25V, Voltage Rating (DC)=25V, Width=0.8mm
C45 C50 C63: "Capacitor (Semiconductor SIM Model)", Capacitance=4.7uF, Case/Package=0805, Case Code (Metric)=2012, Dielectric=X7R, Manufacturer=Murata, Manufacturer Part Number=GRM21BR71C475KA73L, Max Operating Temperature=125°C, Min Operating Temperature=-55°C, Package Quantity=1, Supplier Part Number 1=490-4522-2-ND, Tolerance=10%, Voltage=16V, Case Code (Imperial)=0805, Depth=1.25mm, Height=1.25mm, LatestRevisionDate=29-May-2009, LatestRevisionNote="IPC-7351 Footprint Added.", Lead Free="Lead Free", Length=2mm, Material=Ceramic, Mount="Surface Mount", Number of Pins=2, PackageDescription="Chip Capacitor", PackageReference=C1206, Packaging="Tape and Reel", Pricing 1="3000=0.1698 (USD)", Published=8-Jun-2000, Publisher="Altium Limited", REACH SVHC="No SVHC", Stock 1=0, Supplier 1=Digi-Key, Termination=SMD/SMT, Thickness=0.053inch, Voltage Rating=16V, Voltage Rating (DC)=16V, Width=0.049inch
C47: "Capacitor (Semiconductor SIM Model)", Capacitance=1uF, Case/Package=0603, Case Code (Metric)=1608, Dielectric=X7R, Dielectric Material=Ceramic, Manufacturer=TDK, Manufacturer Part Number=C1608X7R1C105K080AC, Max Operating Temperature=125°C, Min Operating Temperature=-55°C, Package Quantity=1, Supplier Part Number 1=445-1604-1-ND, Tolerance=10%, Voltage=16V, Case Code (Imperial)=0603, Composition=Ceramic, Depth=0.8mm, Height=0.8mm, LatestRevisionDate=29-May-2009, LatestRevisionNote="IPC-7351 Footprint Added.", Lead Free="Lead Free", Length=1.6mm, Mount="Surface Mount", PackageDescription="Chip Capacitor", PackageReference=C1206, Packaging="Tape and Reel", Pricing 1="1=0.12, 10=0.087, 100=0.0387, 500=0.0277, 1000=0.0217 (USD)", Published=8-Jun-2000, Publisher="Altium Limited", Radiation Hardening=No, REACH SVHC="No SVHC", Stock 1=135, Supplier 1=Digi-Key, Termination=SMD/SMT, Thickness=0.037inch, Voltage Rating=16V, Voltage Rating (DC)=16V, Weight=7.1E-05oz, Width=0.031inch
C48: "Capacitor (Semiconductor SIM Model)", Capacitance=22nF, Case/Package=0603, Case Code (Metric)=1608, Dielectric=X7R, Dielectric Material=Ceramic, Manufacturer=TDK, Manufacturer Part Number=C1608X7R1H223K080AA, Max Operating Temperature=125°C, Min Operating Temperature=-55°C, Package Quantity=1, Supplier Part Number 1=445-1312-1-ND, Tolerance=10%, Voltage=50V, Case Code (Imperial)=0603, Composition=Ceramic, Depth=0.8mm, Height=0.8mm, LatestRevisionDate=29-May-2009, LatestRevisionNote="IPC-7351 Footprint Added.", Lead Free="Lead Free", Length=1.6mm, Mount="Surface Mount", Number of Pins=2, PackageDescription="Chip Capacitor", PackageReference=C1206, Packaging="Tape and Reel", Pricing 1="1=0.1, 10=0.074, 100=0.0331, 500=0.0237, 1000=0.0186 (USD)", Published=8-Jun-2000, Publisher="Altium Limited", Radiation Hardening=No, REACH SVHC="No SVHC", Stock 1=0, Supplier 1=Digi-Key, Termination=SMD/SMT, Thickness=0.037inch, Voltage Rating=50V, Voltage Rating (DC)=50V, Weight=7.1E-05oz, Width=0.031inch
C51: "Capacitor (Semiconductor SIM Model)", Capacitance=100nF, Case/Package=1210, Case Code (Metric)=3225, Dielectric=X7R, Dielectric Material=Ceramic, Manufacturer=Murata, Manufacturer Part Number=GRM32NR72A104KA01L, Max Operating Temperature=125°C, Min Operating Temperature=-55°C, Package Quantity=1, Supplier Part Number 1=490-1853-1-ND, Tolerance=10%, Voltage=100V, Case Code (Imperial)=1210, Depth=2.5mm, Dissipation Factor=0.05%, Height=1.35mm, LatestRevisionDate=29-May-2009, LatestRevisionNote="IPC-7351 Footprint Added.", Lead Free="Lead Free", Length=3.2mm, Material=Ceramic, Mount="Surface Mount", PackageDescription="Chip Capacitor", PackageReference=C1206, Packaging="Tape and Reel", Pricing 1="1=0.86, 10=0.608, 100=0.4002, 500=0.2964, 1000=0.252 (USD)", Published=8-Jun-2000, Publisher="Altium Limited", Radiation Hardening=No, Stock 1=0, Supplier 1=Digi-Key, Termination=SMD/SMT, Thickness=0.059inch, Voltage Rating=100V, Voltage Rating (DC)=100V, Weight=0.00388oz, Width=2.5mm
C52: "Capacitor (Semiconductor SIM Model)", Capacitance=1uF, Case/Package=0603, Case Code (Metric)=1608, Dielectric=X7R, Dielectric Material=Ceramic, Manufacturer=TDK, Manufacturer Part Number=C1608X7R1C105K080AC, Max Operating Temperature=125°C, Min Operating Temperature=-55°C, Package Quantity=1, Supplier Part Number 1=445-1604-6-ND, Tolerance=10%, Voltage=16V, Case Code (Imperial)=0603, Composition=Ceramic, Depth=0.8mm, Height=0.8mm, LatestRevisionDate=29-May-2009, LatestRevisionNote="IPC-7351 Footprint Added.", Lead Free="Lead Free", Length=1.6mm, Mount="Surface Mount", PackageDescription="Chip Capacitor", PackageReference=C1206, Packaging="Tape and Reel", Pricing 1="1=0.12, 10=0.087, 100=0.0387, 500=0.0277, 1000=0.0217 (USD)", Published=8-Jun-2000, Publisher="Altium Limited", Radiation Hardening=No, REACH SVHC="No SVHC", Stock 1=8000, Supplier 1=Digi-Key, Termination=SMD/SMT, Thickness=0.037inch, Voltage Rating=16V, Voltage Rating (DC)=16V, Weight=7.1E-05oz, Width=0.031inch
C53 C54 C55 C56 C57 C58 C59 C60: "Capacitor (Semiconductor SIM Model)", Capacitance=1nF, Case/Package=1206, Case Code (Metric)=3216, Dielectric=X7R, Dielectric Material=Ceramic, Manufacturer=Yageo, Manufacturer Part Number=CC1206KKX7RCBB102, Max Operating Temperature=125°C, Min Operating Temperature=-55°C, Package Quantity=1, Supplier Part Number 1=311-1144-1-ND, Tolerance=10%, Voltage Rating=1kV, Case Code (Imperial)=1206, Composition=Ceramic, Depth=1.6mm, Height=1.15mm, LatestRevisionDate=29-May-2009, LatestRevisionNote="IPC-7351 Footprint Added.", Lead Free="Lead Free", Length=3.2mm, Mount="Surface Mount", Number of Pins=2, PackageDescription="Chip Capacitor", PackageReference=C1206, Packaging="Tape and Reel", Pricing 1="1=0.44, 10=0.304, 100=0.1821, 500=0.1366, 1000=0.1154 (USD)", Published=8-Jun-2000, Publisher="Altium Limited", Radiation Hardening=No, REACH SVHC="No SVHC", Stock 1=12559, Supplier 1=Digi-Key, Termination=SMD/SMT, Thickness=0.045inch, Voltage Rating (DC)=1kV, Weight=0.000571oz, Width=1.6mm
C61: "Capacitor (Semiconductor SIM Model)", Capacitance=1uF, Case/Package=1206, Case Code (Metric)=3216, Dielectric=X7R, Manufacturer=Murata, Manufacturer Part Number=GRM31CR72A105KA01L, Max Operating Temperature=125°C, Min Operating Temperature=-55°C, Package Quantity=1, Supplier Part Number 1=490-3909-1-ND, Tolerance=10%, Voltage=100V, Case Code (Imperial)=1206, Depth=1.6mm, Dissipation Factor=0.05%, Height=1.6mm, LatestRevisionDate=29-May-2009, LatestRevisionNote="IPC-7351 Footprint Added.", Lead Free="Lead Free", Length=3.2mm, Material=Ceramic, Mount="Surface Mount", PackageDescription="Chip Capacitor", PackageReference=C1206, Packaging="Tape and Reel", Pricing 1="1=0.9, 10=0.66, 100=0.4526, 500=0.3583, 1000=0.3018 (USD)", Published=8-Jun-2000, Publisher="Altium Limited", Radiation Hardening=No, REACH SVHC="No SVHC", Stock 1=20000, Supplier 1=Digi-Key, Termination=SMD/SMT, Thickness=0.071inch, Voltage Rating=100V, Voltage Rating (DC)=100V, Width=0.063inch
C62: "Capacitor (Semiconductor SIM Model)", Capacitance=4.7uF, Case/Package=1206, Case Code (Metric)=3216, Dielectric=X7R, Manufacturer=Murata, Manufacturer Part Number=GRM31CR71H475KA12L, Max Operating Temperature=125°C, Min Operating Temperature=-55°C, Package Quantity=2000, Supplier Part Number 1=490-6521-1-ND, Tolerance=10%, Voltage=50V, Case Code (Imperial)=1206, Depth=1.6mm, Height=1.6mm, LatestRevisionDate=29-May-2009, LatestRevisionNote="IPC-7351 Footprint Added.", Lead Free="Lead Free", Length=3.2mm, Material=Ceramic, Mount="Surface Mount", PackageDescription="Chip Capacitor", PackageReference=C1206, Packaging="Tape and Reel", Pricing 1="1=0.98, 10=0.723, 100=0.4961, 500=0.3928, 1000=0.3307 (USD)", Published=8-Jun-2000, Publisher="Altium Limited", Radiation Hardening=No, REACH SVHC="No SVHC", Stock 1=0, Supplier 1=Digi-Key, Termination=SMD/SMT, Thickness=0.071inch, Voltage Rating=50V, Voltage Rating (DC)=50V, Width=0.063inch
D1_1 D1_2 D1_3 D1_4 D1_5 D1_6 D1_7 D1_8 D1_9 D1_10 D1_11 D1_12 D1_13 D1_14 D1_15 D1_16: "Zener Diode", Case/Package=SOD-123-2, Forward Voltage=900mV, Manufacturer=Diodes, Manufacturer Part Number=DDZ6V2B-7, Max Operating Temperature=150°C, Max Power Dissipation=500mW, Max Reverse Leakage Current=500nA, Min Operating Temperature=-65°C, Output Current=40mA, Package Quantity=3000, Supplier Part Number 1=DDZ6V2BDICT-ND, Test Current=20mA, Tolerance=3%, Voltage Rating (DC)=6.2V, Voltage Tolerance=2.535%, Element Configuration=Single, Height=1.35mm, Impedance=7R, LatestRevisionDate=17-Jul-2002, LatestRevisionNote="Re-released for DXP Platform.", Lead Free="Lead Free", Length=3.85mm, Mount="Surface Mount", Number of Pins=2, PackageDescription="Diode, Thru-Hole; 2 Leads; 0.7 in Pin Spacing", PackageReference=DIODE-0.7, Packaging="Tape and Reel", Peak Reverse Current=500nA, Power Dissipation=500mW, Power Rating=500mW, Pricing 1="1=0.28, 10=0.229, 100=0.1215, 500=0.08, 1000=0.0544 (USD)", Published=8-Jun-2000, Publisher="Altium Limited", Radiation Hardening=No, Stock 1=26951, Supplier 1=Digi-Key, Termination=SMD/SMT, Weight=0.000353oz, Width=1.7mm, Working Voltage=6.2V, Zener Current=500nA, Zener Voltage=6.2V
D2_1 D2_2 D2_3 D2_4 D2_5 D2_6 D2_7 D2_8 D2_9 D2_10 D2_11 D2_12 D2_13 D2_14 D2_15 D2_16: "Typical INFRARED GaAs LED", Case/Package=1206, Case Code (Metric)=3216, Colour=Green,Yellow, Forward Current=20mA, Forward Voltage=2.2V, Illumination Colour=Green, Lens Colour=Clear,White, Manufacturer="Broadcom Avago", Manufacturer Part Number=HSMG-C150, Max Operating Temperature=85°C, Max Power Dissipation=65mW, Min Operating Temperature=-30°C, Package Quantity=1, Reverse Voltage=5V, Supplier Part Number 1=516-1443-1-ND, Case Code (Imperial)=1206, Contact Plating=Gold, Depth=1.6mm, Dominant Wavelength=572nm, Height=1.1mm, LatestRevisionDate=08-Jul-2005, LatestRevisionNote="Mech Layer 1 removed.", Length=3.2mm, Lens Style=Colorless,Diffused,Rectangular, Lens Transparency=Diffused, Luminous Intensity=15mcd, Mount="Surface Mount", Number of Elements=1, Number of LEDs=1, Number of Pins=2, PackageDescription="LED; 2 Leads", PackageReference=LED-0, Packaging="Tape and Reel", Power Dissipation=65mW, Power Rating=65mW, Pricing 1="1=0.55, 10=0.4, 25=0.3304, 100=0.268, 250=0.2292, 500=0.1981, 1000=0.1593 (USD)", Published=8-Jun-2000, Publisher="Altium Limited", Radiation Hardening=No, REACH SVHC="No SVHC", Stock 1=301461, Supplier 1=Digi-Key, Test Current=20mA, Viewing Angle=170°, Wavelength=572nm, Width=1.6mm
D17 D18 D19 D20: library part Diode, "Default Diode", Average Rectified Current=300mA, Capacitance=2pF, Current=15A, Current Rating=150mA, Forward Voltage=1.25V, Manufacturer=Diodes, Manufacturer Part Number=1N4148W-7-F, Max Forward Surge Current (Ifsm)=2A, Max Operating Temperature=150°C, Max Repetitive Reverse Voltage (Vrrm)=100V, Min Operating Temperature=-65°C, Package Quantity=3000, Peak Reverse Current=1uA, Power Dissipation=400mW, Supplier Part Number 1=1N4148W-FDICT-ND, Voltage Rating (DC)=75V, Code_JEDEC=DO-214-AB, Contact Plating=Matte,Tin, Element Configuration=Single, Forward Current=150mA, Height=1.25mm, LatestRevisionDate=17-Jul-2002, LatestRevisionNote="Re-released for DXP Platform.", Lead Free="Lead Free", Length=2.85mm, Max Reverse Voltage (DC)=100V, Max Surge Current=2A, Mount="Surface Mount", Number of Pins=2, Output Current=150mA, PackageDescription="DO-214-AB/SMC; 2 C-Bend Leads; Body 7.9 x 5.9 mm, inc. leads (LxW)", PackageReference=SMC, PackageVersion=Sep-1996, Packaging="Tape and Reel", Peak Non-Repetitive Surge Current=2A, Polarity=Standard, Power Rating=400mW, Pricing 1="1=0.18, 10=0.164, 100=0.0891, 500=0.0548, 1000=0.0374 (USD)", Published=8-Jun-2000, Publisher="Altium Limited", Radiation Hardening=No, REACH SVHC="No SVHC", Recovery Time=4ns, Reverse Recovery Time=4ns, Stock 1=0, Supplier 1=Digi-Key, Voltage=100V, Weight=0.000353oz, Width=1.7mm
D33 D34 D35 D36 D37 D38 D39 D40: library part DIODE, "Default Diode", Breakdown Voltage=5.8V, Capacitance=2.6pF, Leakage Current=100nA, Manufacturer="NXP Semiconductors", Manufacturer Part Number=PESD5V0U1UA,115, Max Breakdown Voltage=8.8V, Max Operating Temperature=150°C, Min Operating Temperature=-55°C, Operating Supply Voltage=5V, Package Quantity=1, Power Line Protection=No, Supplier Part Number 1=1727-4155-1-ND, Code_JEDEC=DO-214-AB, Composition=Zener, Depth=1.35mm, Direction=Unidirectional, Element Configuration=Single, LatestRevisionDate=17-Jul-2002, LatestRevisionNote="Re-released for DXP Platform.", Lead Free="Lead Free", Length=1.8mm, Min Breakdown Voltage=5.8V, Mount="Surface Mount", Number of Channels=1, Number of Pins=2, Number of Unidirectional Channels=1, PackageDescription="DO-214-AB/SMC; 2 C-Bend Leads; Body 7.9 x 5.9 mm, inc. leads (LxW)", PackageReference=SMC, PackageVersion=Sep-1996, Packaging="Tape and Reel", Polarity=Unidirectional, Pricing 1="1=0.48, 10=0.36, 100=0.2243, 500=0.1535, 1000=0.1181 (USD)", Published=8-Jun-2000, Publisher="Altium Limited", Radiation Hardening=No, Reverse Standoff Voltage=5V, Stock 1=107363, Supplier 1=Digi-Key, Termination=SMD/SMT, Working Voltage=5V
H1: Colour=Natural, Contact Resistance=10mR, Manufacturer=Molex, Manufacturer Part Number=0022124062, Max Operating Temperature=75°C, Min Operating Temperature=0°C, Package Quantity=1000, Supplier Part Number 1=WM13446-ND, Connector Type="Male Pin", Contact Material=Brass, Contact Mating Length=0.264inch, Contact Plating=Gold, Depth=14.42mm, Fastening Type=Friction, Gender=Male, Housing Colour=Natural, Housing Material=Nylon, Length=15.24mm, Mount="Through Hole", Number of Contacts=6, Number of Positions=6, Number of Rows=1, Orientation="Right Angle", Packaging=Bulk, Pitch=2.54mm, Pricing 1="1=1.06, 10=0.934, 100=0.8059, 500=0.6593, 1000=0.5861, 5000=0.5128, 10000=0.4872 (USD)", Stock 1=3075, Supplier 1=Digi-Key, Termination=Solder
H2: Colour=Black, Contact Resistance=10mR, Manufacturer=Molex, Manufacturer Part Number=0430451601, Max Operating Temperature=105°C, Max Voltage Rating (AC)=250V, Min Operating Temperature=-40°C, Supplier Part Number 1=WM7490-ND, Connector Type="Male Pin", Contact Material=Brass, Contact Plating=Gold, Depth=12.2mm, Fastening Type=Ramp, Housing Colour=Black, Housing Material=Polymer, Length=28.15mm, Mount="Through Hole", Number of Contacts=16, Number of Positions=16, Number of Rows=2, Orientation="Right Angle", Packaging=Tray, Pitch=3mm, Pricing 1="1=4.7, 10=4.512, 100=3.7602, 792=2.9142, 1584=2.6321 (USD)", Row Spacing=0.118inch, Stock 1=3016, Supplier 1=Digi-Key, Termination=Solder
Q1_1 Q1_2 Q1_3 Q1_4 Q1_5 Q1_6 Q1_7 Q1_8 Q1_9 Q1_10 Q1_11 Q1_12 Q1_13 Q1_14 Q1_15 Q1_16: library part MOSFET-N, "N-Channel MOSFET", Case/Package=SOT-23-3, Continuous Drain Current (ID)=320mA, Drain to Source Resistance=1.6R, Gate to Source Voltage (Vgs)=20V, Input Capacitance=24.5pF, Manufacturer="ON Semiconductor", Manufacturer Part Number=2V7002KT1G, Max Operating Temperature=150°C, Max Power Dissipation=300mW, Min Operating Temperature=-55°C, Package Quantity=1, Power Dissipation=420mW, Supplier Part Number 1=2V7002KT1GOSCT-ND, Threshold Voltage=1V, Contact Plating=Matte,Tin, Element Configuration=Single, Fall Time=29ns, Halogen Free="Halogen Free", Height=1.01mm, LatestRevisionDate=17-Jul-2002, LatestRevisionNote="Re-released for DXP Platform.", Lead Free="Lead Free", Length=3.04mm, Number of Elements=1, Number of Pins=3, PackageDescription="TO, Flat Index; 3 In-Line, Axial Leads; Body Dia. 4.6mm; Lead Dia. 0.5 mm (max)", PackageReference=E3, PackageVersion=1995/1996, Packaging="Tape and Reel", Pricing 1="1=0.29, 10=0.265, 100=0.1484, 500=0.0795, 1000=0.0541 (USD)", Published=8-Jun-2000, Publisher="Altium Limited", Radiation Hardening=No, Rds On Max=1.6R, REACH SVHC="No SVHC", Rise Time=9ns, Stock 1=0, Supplier 1=Digi-Key, Turn-Off Delay Time=55.8ns, Turn-On Delay Time=12.2ns, Width=1.4mm